# Altium PCB PCB MP.PcbDoc
Units mil, origin at the board's own origin, x right, y up, seen from the top; angles counter-clockwise.
Board outline 6000 x 4000 mil, 2 copper layers (Top Layer, Bottom Layer); 15 components, 14 nets, 89 pads, 12 vias.
Unrouted connection lines stored in the file: 11.
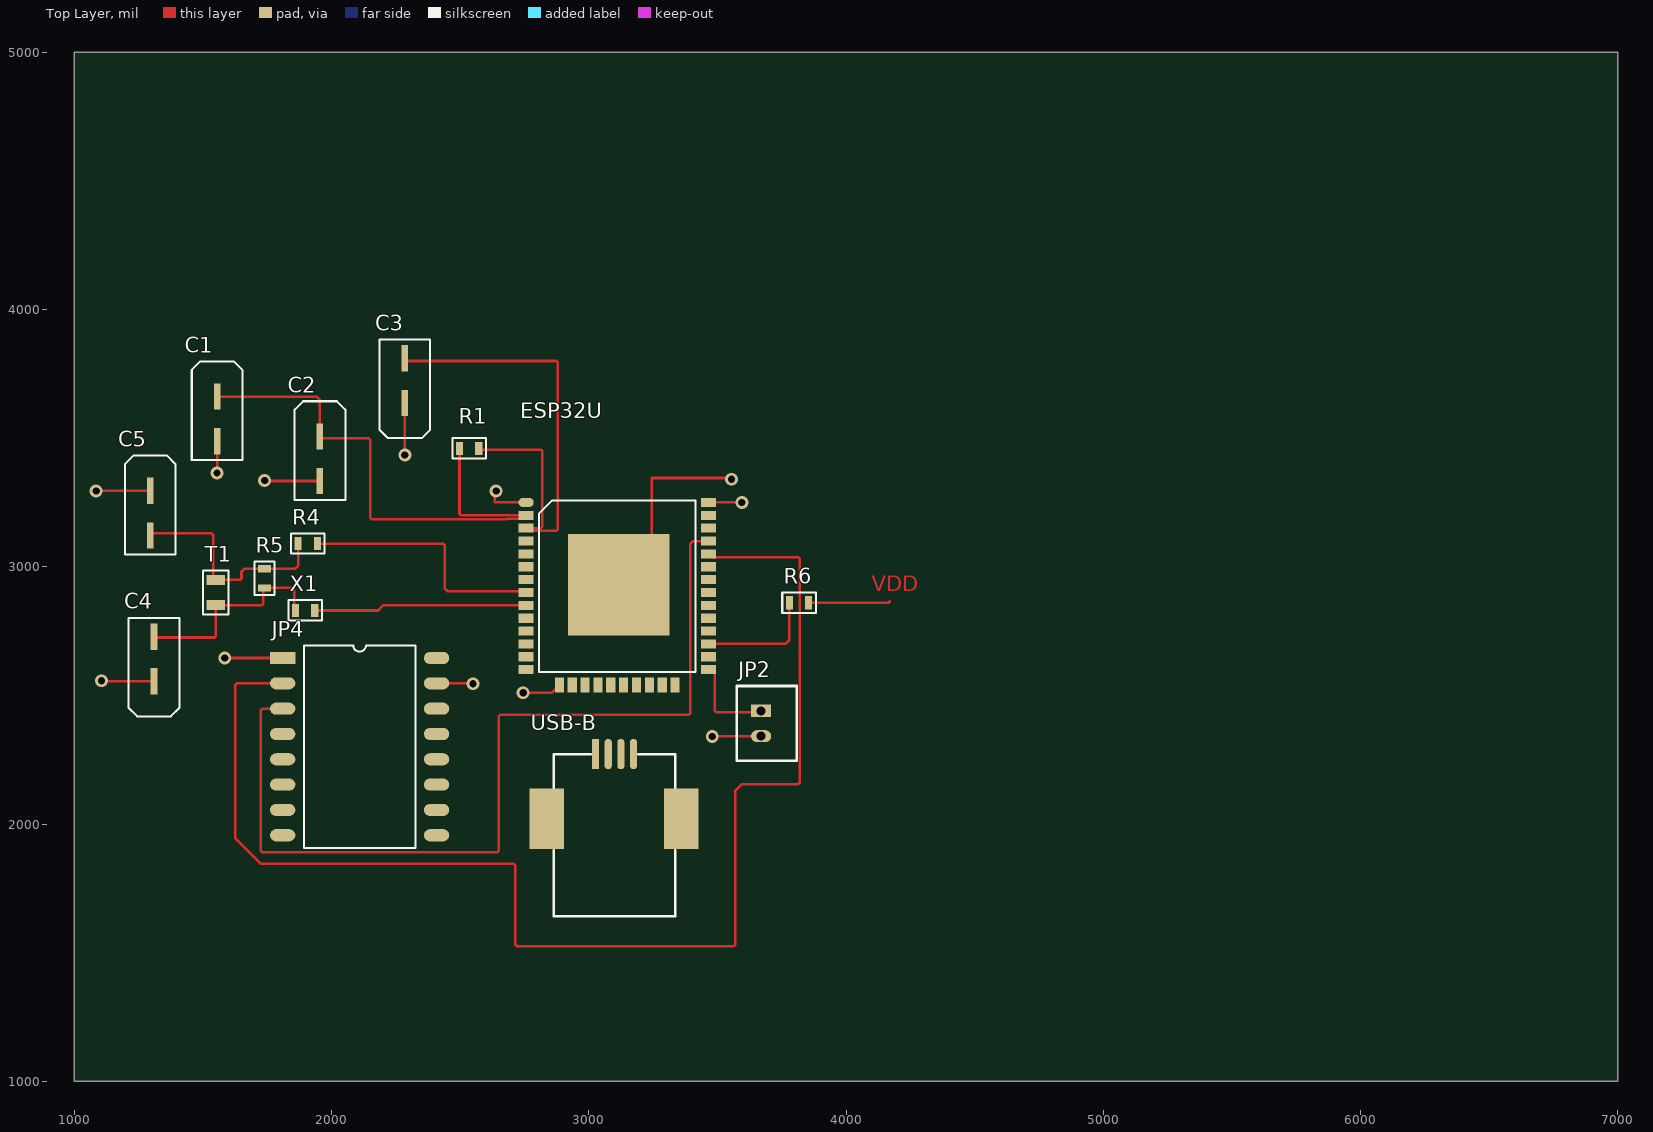
[diagram p0: Top Layer view]
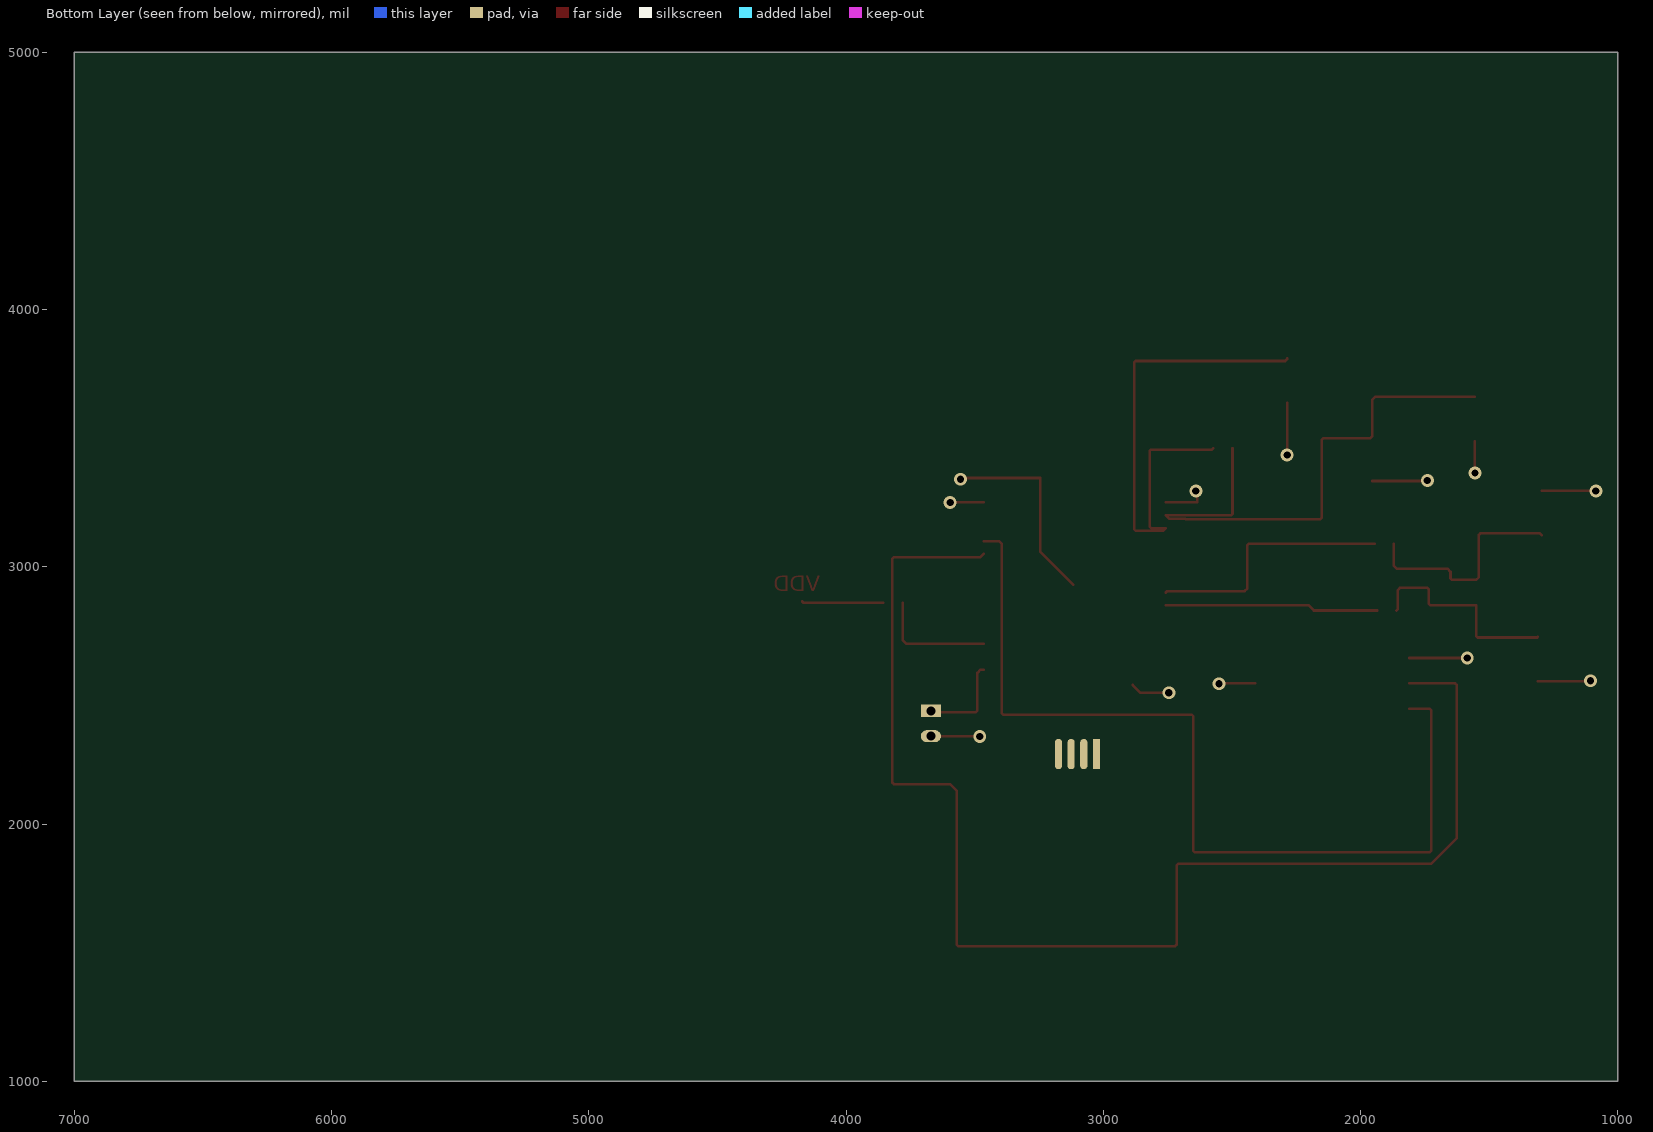
[diagram p1: Bottom Layer view, seen from below]
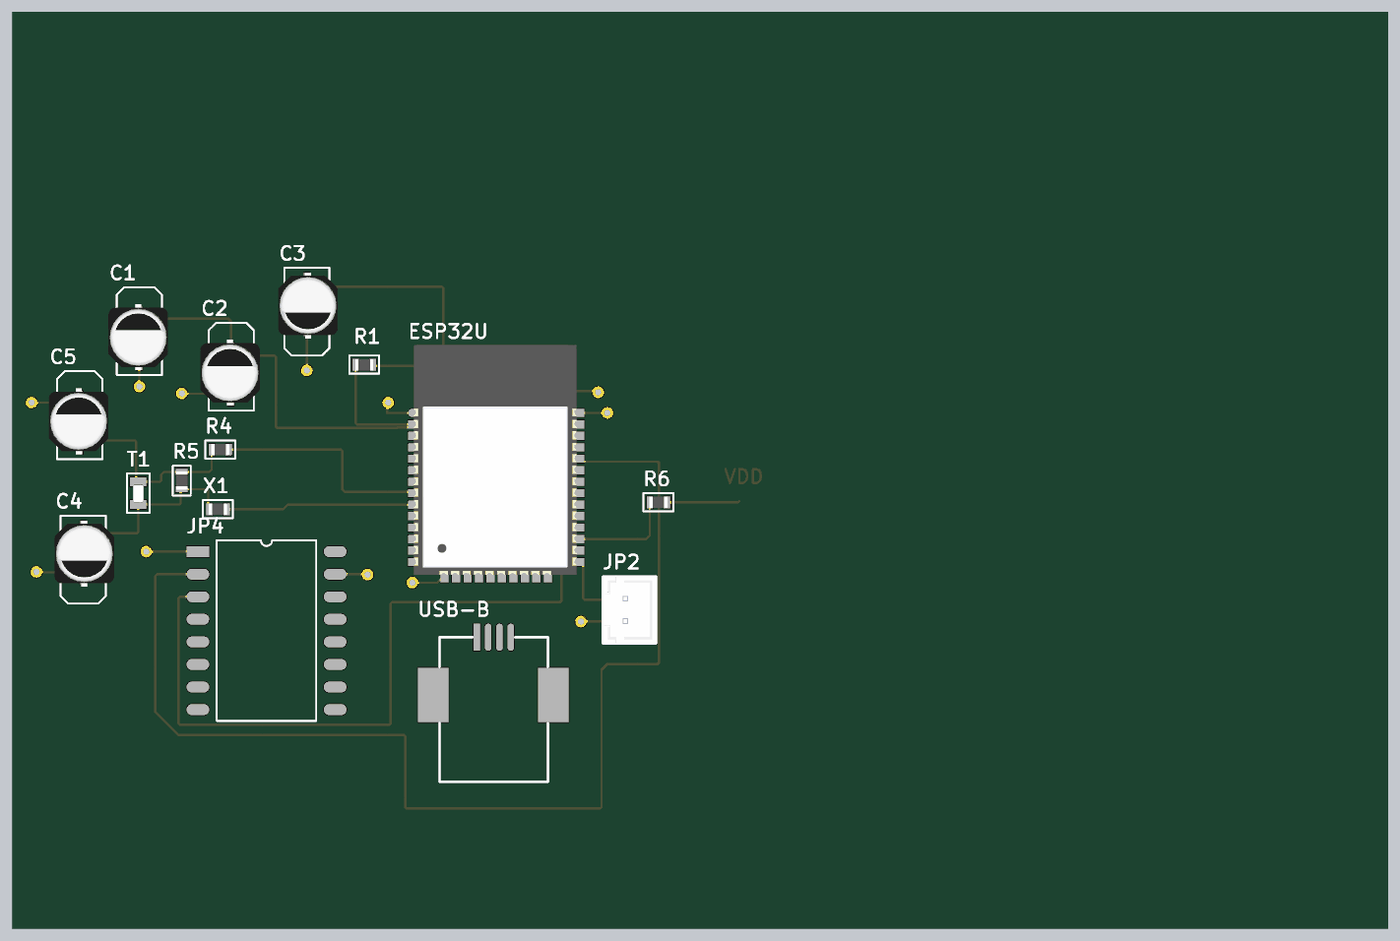
[diagram p2: 3D render of the assembled board from above, using the file's embedded part models]

## Layer stack, top to bottom
Top Solder: solder mask 0.4, Solder Resist, Dk 3.5
Top Layer: signal copper 1.4
Dielectric 1: dielectric 12.6, FR-4, Dk 4.8
Bottom Layer: signal copper 1.4
Bottom Solder: solder mask 0.4, Solder Resist, Dk 3.5

## Board outline
1000,1000 7000,1000 7000,5000 1000,5000

## Design rules (kind name [scope] priority, off if disabled: settings)
Clearance [All] p1: gap=10 ignorepadtopadclearanceinfootprint=FALSE
PolygonConnect [All] p1: connectstyle=Relief reliefconductorwidth=10 reliefentries=4 polygonreliefangle="90 Angle" airgapwidth=10
RoutingVias [All] p1: holewidth=28 width=50 viastyle="Through Hole" minholewidth=28 minwidth=50 maxholewidth=28 maxwidth=50
SolderMaskExpansion [All] p1: expansion=4 istentingtop=FALSE
SupplyNets "Schematic Supply Nets" [InNet('GND')] p1: voltage=0.000
Width [All] p1: maxlimit=10 minlimit=10 preferedwidth=10
30 further rules are at their usual default settings.

## Components (designator, comment, footprint, x,y, rotation, side; value= is the part's Value field where it differs from the comment)
C1 "22UF" Capacitor 1555,3575 r90 top
C2 "0.1UF" Capacitor 1955,3420 r90 top
C3 "CAP" Capacitor 2285,3723.39 r270 top
C4 "CAP" Capacitor 1310,2641.61 r270 top
C5 "CAP" Capacitor 1295,3208.39 r90 top
ESP32U "ESP32U" ESP32U 2756.34,3250 r0 top
JP2 "BOOT OPTION" "HEADER 2 PINS - duplicate" 3670,2390.79 r0 top
JP4 "CH340G" "CH340G - duplicate1" 1810,2645.28 r0 top
R1 "0805" Resistor 2535,3460 r0 top
R4 "0805" Resistor 1907.4,3090 r0 top
R5 "0805" Resistor 1740,2955 r90 top
R6 "10K" Resistor 3817.4,2860 r0 top
T1 "CRYSTAL" CRYSTAL 1550,2900 r270 top
USB-B "USB-B" "USB-B - duplicate1" 3100.16,2271.97 r0 top
X1 "0805" Resistor 1897.4,2830 r0 top

## Footprints (in the part's own frame and the unit in brackets; to place one, negate y for a bottom-side part, rotate by r counter-clockwise, add the part's x,y. Pads: shape width x height; smd on the part's side, far side on the other; paste and mask are expansions set on the pad)
Capacitor [mm]
  rect 2.6x0.65 smd: 1(-2.2,0) 2(2.2,0)
  silkscreen extent -4.06,-2.5 5.68,2.5, body extent -3.52,-3.17 3.78,3.43, height 5.8
"CH340G - duplicate1" [mm]
  rect 2.5x1.2 smd: 1(0,0)
  oval 2.5x1.2 smd: 2(0,-2.5) 3(0,-5) 4(0,-7.5) 5(0,-10) 6(0,-12.5) 7(0,-15) 8(0,-17.5) 9(15.2,-17.5) 10(15.2,-15) 11(15.2,-12.5) 12(15.2,-10) 13(15.2,-7.5) 14(15.2,-5) 15(15.2,-2.5) 16(15.2,0)
  silkscreen extent 2.08,-18.75 13.12,1.25
CRYSTAL [mm]
  rect 1x1.8 smd: 1(-1.25,0) 2(1.25,0)
  silkscreen extent -2.19,-1.26 2.17,1.27, body extent -0.97,-0.59 1.03,0.61, height 0.6
ESP32U [mm]
  oval 1.5x0.9 smd: 1(0,0)
  rect 1.5x0.9 smd: 2(0,-1.27) 3(0,-2.54) 4(0,-3.81) 5(0,-5.08) 6(0,-6.35) 7(0,-7.62) 8(0,-8.89) 9(0,-10.16) 10(0,-11.43) 11(0,-12.7) 12(0,-13.97) 13(0,-15.24) 14(0,-16.51) 25(18,-16.51) 26(18,-15.24) 27(18,-13.97) 28(18,-12.7) 29(18,-11.43) 30(18,-10.16) 31(18,-8.89) 32(18,-7.62) 33(18,-6.35) 34(18,-5.08) 35(18,-3.81) 36(18,-2.54) 37(18,-1.27) 38(18,0)
  rect 0.9x1.5 smd: 15(3.285,-18.01) 16(4.555,-18.01) 17(5.825,-18.01) 18(7.095,-18.01) 19(8.365,-18.01) 20(9.635,-18.01) 21(10.905,-18.01) 22(12.175,-18.01) 23(13.445,-18.01) 24(14.715,-18.01)
  rect 10x10 smd: 39(9.144,-8.128)
  silkscreen extent 1.28,-16.73 16.72,0.22, body extent -0.11,-17.96 17.89,7.54, height 3.2
"HEADER 2 PINS - duplicate" [mm]
  rect 2x1.2 hole 0.9: 1(0,1.25)
  oval 2x1.2 hole 0.9: 2(0,-1.25)
  silkscreen extent -2.4,-3.7 3.5,3.7, body extent -2.25,-3.7 3.5,3.7, height 7
Resistor [mm]
  rect 0.7x1.3 smd: 1(-0.95,0) 2(0.95,0)
  silkscreen extent -1.66,-0.99 1.66,1.02, body extent -1,-0.62 1,0.63, height 0.6
"USB-B - duplicate1" [mm]
  rect 0.71x3 smd: A1(-1.875,0)
  oval 0.71x3 smd: A2(-0.625,0) A3(0.625,0) A4(1.875,0)
  rect 3.4x6 smd: A5(-6.7,-6.4) A5(6.6,-6.4)
  rect 0.71x3 smd far side: B1(-1.875,0)
  oval 0.71x3 smd far side: B2(-0.625,0) B3(0.625,0) B4(1.875,0)
  silkscreen extent -6,-16 6,0

## Part data
C1 C2: library part CAP, MANUFACTURER=PANASONIC, MANUFACTURER PART=EEHZA1V470P, SUPPLIER PART NUMBER=C178639, SUPPLIER=LCSC
C3 C4 C5: MANUFACTURER=PANASONIC, MANUFACTURER PART=EEHZA1V470P, SUPPLIER PART NUMBER=C178639, SUPPLIER=LCSC
ESP32U: MANUFACTURER=Ai-Thinker, MANUFACTURER PART=ESP32-S, SUPPLIER PART NUMBER=C277944, SUPPLIER=LCSC
JP2: library part "HEADER 2 PINS", MANUFACTURER="JST Sales America Inc.", MANUFACTURER PART=B2B-XH-A, SUPPLIER PART NUMBER=455-B2B-XH-A-ND, SUPPLIER=DIGIKEY
JP4: MANUFACTURER=WCH, SUPPLIER PART NUMBER=C14267, MANUFACTURER PART=CH340G, SUPPLIER=LCSC
R1 R4 R5 X1: MANUFACTURER=YAGEO, MANUFACTURER PART=RC0805FR-0710KL, SUPPLIER PART NUMBER=C84376, SUPPLIER=LCSC
R6: library part 0805, MANUFACTURER=YAGEO, MANUFACTURER PART=RC0805FR-0710KL, SUPPLIER PART NUMBER=C84376, SUPPLIER=LCSC
T1: MANUFACTURER=EPSON, MANUFACTURER PART=Q13FC13500004, SUPPLIER PART NUMBER=C32346, SUPPLIER=LCSC
USB-B: MANUFACTURER="Switchcraft Inc.", MANUFACTURER PART=RAHUB20, SUPPLIER PART NUMBER=137-RAHUB20-ND, SUPPLIER=DIGIKEY

## Via types
v1: diameter 50, hole 28, Top Layer to Bottom Layer, 12 vias

## Nets (pads, with @x,y where several pads share a name; then routed paths per layer and width w, separated by ;. In a path a pad name is that pad's centre, name@x,y a point inside that pad or via, vN(x,y) a via of type N, cw(c..) or ccw(c..) an arc to the next point about the centre after c; other vN are vias at no path point)
GND: C1.1 C2.1 C3.2 C4.2 C5.2 ESP32U.1 ESP32U.15 ESP32U.38 ESP32U.39 JP2.2 JP4.1 JP4.15 | length 2745.7
  Top Layer w10: v1(1085,3295) C5.2 ; v1(1106.2,2556.8) 1108.01,2555 C4.2 ; v1(1555,3365) C1.1 ; v1(1585,2645) 1585.28,2645.28 JP4.1 ; v1(1740,3335) 1741.61,3333.39 C2.1 ; v1(2285,3435) C3.2 ; JP4.15 2548.15,2546.85 v1(2550,2545) ; v1(2640,3295) 2635,3290 2635,3250 ESP32U.1 ; v1(2745,2510) 2854.72,2510 ESP32U.15 ; ESP32U.39 3245,3058.66 3245,3345 3550,3345 v1(3555,3340) ; ESP32U.38 v1(3595,3250) ; v1(3480,2340) 3481.57,2341.57 JP2.2
NetC1_2: C1.2 C2.2 ESP32U.2 R1.1 | length 2180.9
  Top Layer w10: C1.2 1941.61,3661.61 1955,3648.23 C2.2 1961.61,3500 2144.14,3500 2150,3494.14 2150,3190.86 2155.86,3185 2680,3185 2682.28,3187.28 2743.62,3187.28 ESP32U.2 2503.46,3200 2497.6,3205.86 R1.1
NetC3_1: C3.1 ESP32U.3 R1.2 | length 1992.8
  Top Layer w10: C3.1 2285,3807.8 2292.8,3800 2874.14,3800 2880,3794.14 2880,3145.86 2874.14,3140 2766.34,3140 ESP32U.3 2814.14,3150 2820,3155.86 2820,3449.14 2814.14,3455 2577.4,3455 R1.2
NetC4_1: C4.1 R5.1 T1.2 X1.1 | length 813.9
  Top Layer w10: C4.1 1313.23,2725 1544.14,2725 1550,2730.86 T1.2 1729.14,2850.79 1735,2856.65 1735,2912.6 R5.1 1846.54,2917.6 1855,2909.14 1855,2835 X1.1
NetC5_1: C5.1 R4.1 R5.2 T1.1 | length 873.9
  Top Layer w10: C5.1 1295,3122.2 1302.8,3130 1534.14,3130 1540,3124.14 1540,2959.21 T1.1 1644.14,2949.21 1650,2955.07 1650,2980 1662.4,2992.4 R5.2 1859.14,2992.4 1870,3003.26 R4.1
NetESP32U_8: ESP32U.8 R4.2 | length 989.3
  Top Layer w10: R4.2 2434.14,3090 2440,3084.14 2440,2915 2450,2905 2751.34,2905 ESP32U.8
NetESP32U_9: ESP32U.9 X1.2 | length 829.8
  Top Layer w10: X1.2 2180.86,2830 2200.86,2850 ESP32U.9
NetESP32U_25: ESP32U.25 JP2.1 | length 361.2
  Top Layer w10: ESP32U.25 3476.81,2600 3489.53,2587.28 3489.53,2440.86 3495.39,2435 3665,2435 JP2.1
NetESP32U_27: ESP32U.27 R6.1 | length 465.7
  Top Layer w10: ESP32U.27 3764.14,2700 3780,2715.86 R6.1
NetESP32U_34: ESP32U.34 JP4.2 | length 5180
  Top Layer w10: JP4.2 1631.85,2546.85 1625,2540 1625,1945 1725,1845 2709.14,1845 2715,1839.14 2715,1530.86 2720.86,1525 3564.14,1525 3570,1530.86 3570,2130 3595,2155 3814.14,2155 3820,2160.86 3820,3031.43 3814.14,3037.28 3477.72,3037.28 ESP32U.34
NetESP32U_35: ESP32U.35 JP4.3 | length 3570.4
  Top Layer w10: JP4.3 1730.86,2448.43 1725,2442.57 1725,1895.86 1730.86,1890 2644.14,1890 2650,1895.86 2650,2419.14 2655.86,2425 3389.14,2425 3395,2430.86 3395,3090 3405,3100 ESP32U.35
NetJP4_5: JP4.5
NetJP4_6: JP4.6
NetJP4_16: JP4.16
pads on no net: ESP32U.4 ESP32U.5 ESP32U.6 ESP32U.7 ESP32U.10 ESP32U.11 ESP32U.12 ESP32U.13 ESP32U.14 ESP32U.16 ESP32U.17 ESP32U.18 ESP32U.19 ESP32U.20 ESP32U.21 ESP32U.22 ESP32U.23 ESP32U.24 ESP32U.26 ESP32U.28 ESP32U.29 ESP32U.30 ESP32U.31 ESP32U.32 ESP32U.33 ESP32U.36 ESP32U.37 JP4.4 JP4.7 JP4.8 JP4.9 JP4.10 JP4.11 JP4.12 JP4.13 JP4.14 R6.2 USB-B.A1 USB-B.A2 USB-B.A3 USB-B.A4 USB-B.A5 USB-B.B1 USB-B.B2 USB-B.B3 USB-B.B4
copper on no net: | length 317.3
  Top Layer w10: 3854.8,2860 4165,2860 4170,2865

## Other copper
Top Layer:
  text "VDD" at 4100,2905 h60